# Altium PCB PCB2.PcbDoc
Units mil, origin at the board's own origin, x right, y up, seen from the top; angles counter-clockwise.
Board outline 3060 x 1795 mil, 2 copper layers (Top Layer, Bottom Layer); 19 components, 6 nets, 64 pads, 28 vias.
Unrouted connection lines stored in the file: 1.
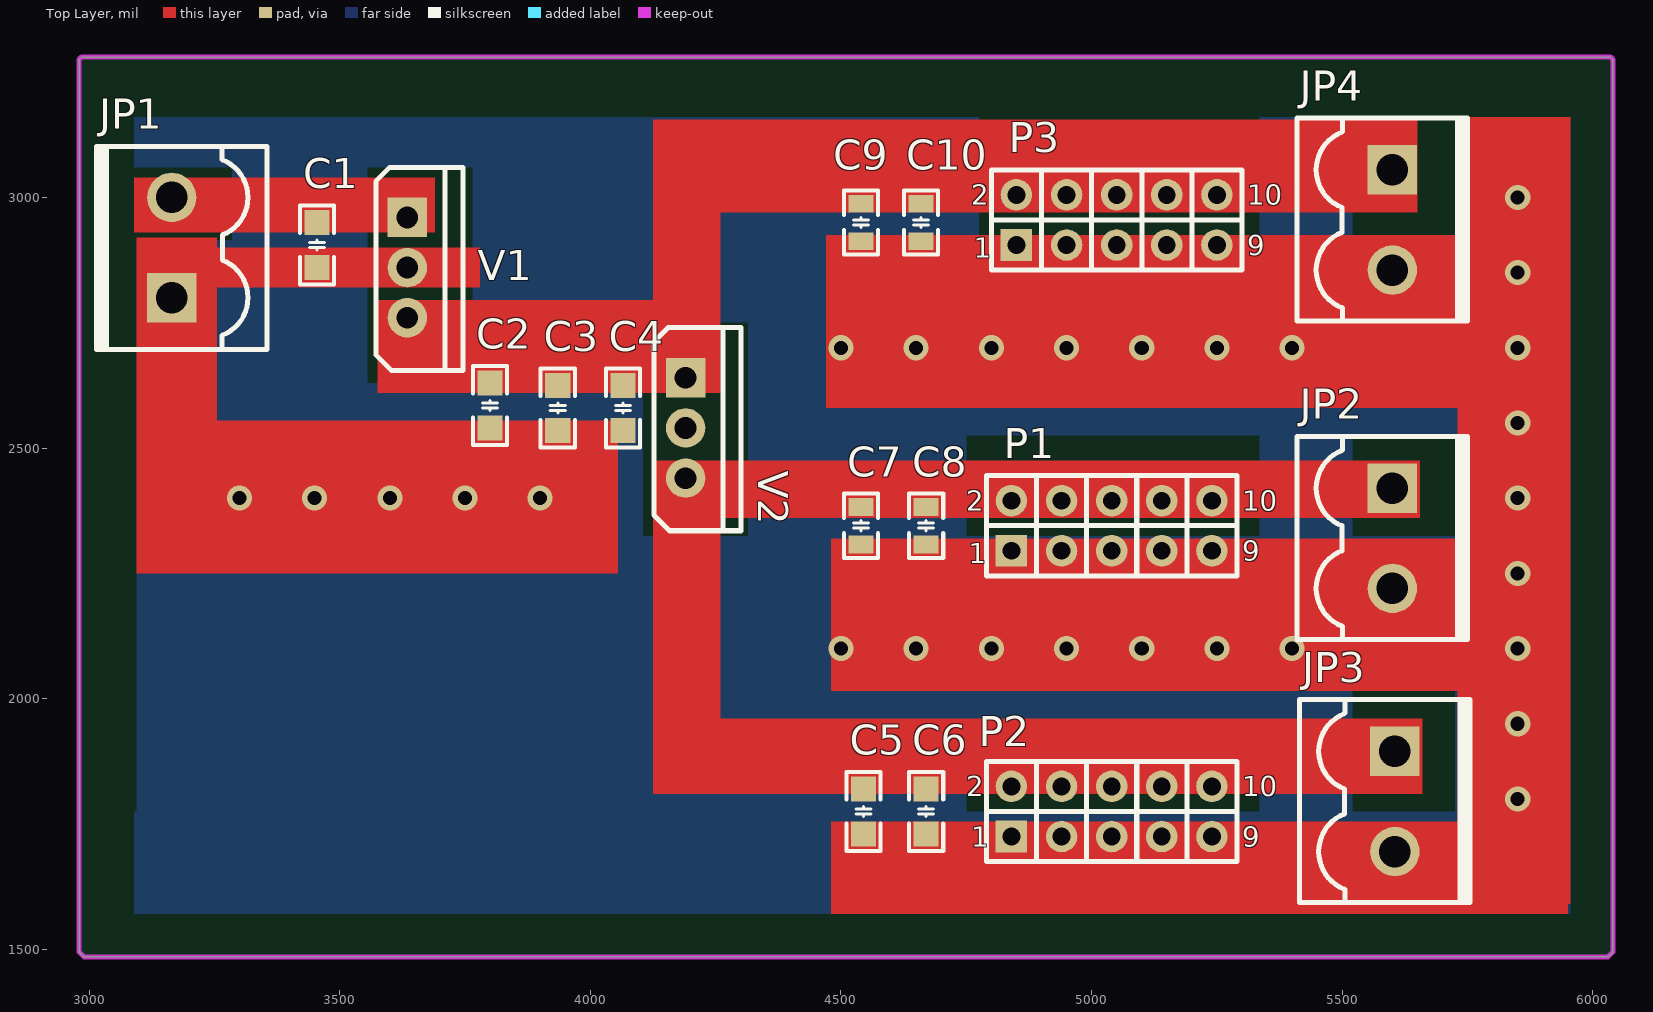
[diagram p0: Top Layer view]
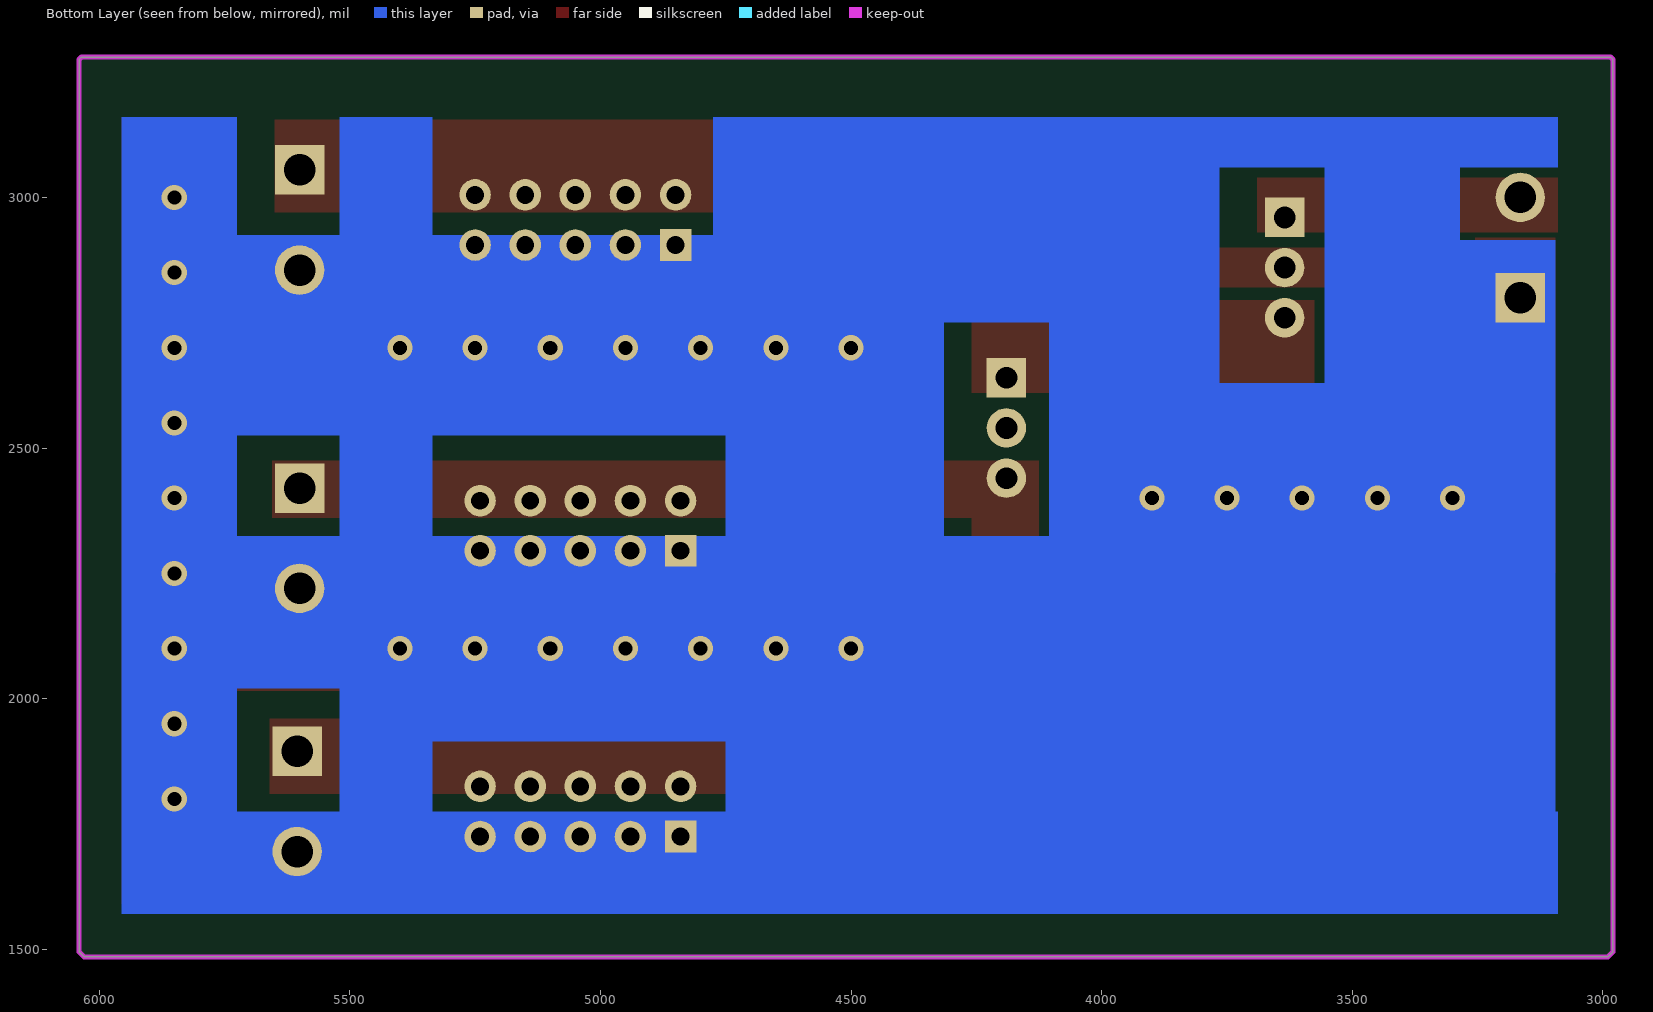
[diagram p1: Bottom Layer view, seen from below]

## Layer stack, top to bottom
Top Solder: solder mask 0.4, Solder Resist, Dk 3.5
Top Layer: signal copper 1.4
Dielectric 1: dielectric 12.6, FR-4, Dk 4.8
Bottom Layer: signal copper 1.4
Bottom Solder: solder mask 0.4, Solder Resist, Dk 3.5

## Board outline
2980,1495 2980,3275 2985,3280 6035,3280 6040,3275 6040,1495 6030,1485 2990,1485

## Design rules (kind name [scope] priority, off if disabled: settings)
Clearance [All] p1: gap=10 ignorepadtopadclearanceinfootprint=FALSE except(0: Arc-Hole Track-Hole SMDPad-Hole THPad-Hole Via-Hole Fill-Hole Poly-Hole Region-Hole Text-Hole)
PolygonConnect [All] p1: connectstyle=Relief reliefconductorwidth=10 reliefentries=4 polygonreliefangle="90 Angle" airgapwidth=10
RoutingVias [All] p1: holewidth=28 width=50 viastyle="Through Hole" minholewidth=28 minwidth=50 maxholewidth=28 maxwidth=50
SolderMaskExpansion [All] p1: expansion=4
Width [All] p1: maxlimit=10 minlimit=10 preferedwidth=10
30 further rules are at their usual default settings.

## Classes and differential pairs
component class Sheet2: C1 C2 C3 C4 C5 C6 V1 V2

## Components (designator, comment, footprint, x,y, rotation, side; value= is the part's Value field where it differs from the comment)
C1 "104" "C 0805_M" 3455,2905 r270 top
C2 "106" "C 0805_M" 3800,2585 r270 top value=104
C3 "104" "C 0805_M" 3935,2580 r270 top
C4 "104" "C 0805_M" 4065,2580 r270 top
C5 "106" "C 0805_M" 4545,1775 r270 top value=104
C6 "104" "C 0805_M" 4670,1775 r270 top
C7 "Comment" "C 0805_L" 4540,2345 r270 top
C8 "Comment" "C 0805_L" 4670,2345 r270 top
C9 "Comment" "C 0805_L" 4540,2950 r270 top
C10 "Comment" "C 0805_L" 4660,2950 r270 top
JP1 "Comment" KF2EDGK5.08-LI-2P 3165,2900 r90 top
JP2 "Comment" KF2EDGK5.08-LI-2P 5600,2320 r270 top
JP3 "Comment" KF2EDGK5.08-LI-2P 5605,1795 r270 top
JP4 "Comment" KF2EDGK5.08-LI-2P 5600,2955 r270 top
P1 "Comment" HDR2.54-LI-2x5P 5040,2345 r0 top
P2 "Comment" HDR2.54-LI-2x5P 5040,1775 r0 top
P3 "Comment" HDR2.54-LI-2x5P 5050,2955 r0 top
V1 "HT7150" TO220A 3635,2860 r270 top
V2 "HT7133" TO220A 4190,2540 r270 top

## Footprints (in the part's own frame and the unit in brackets; to place one, negate y for a bottom-side part, rotate by r counter-clockwise, add the part's x,y. Pads: shape width x height; smd on the part's side, far side on the other; paste and mask are expansions set on the pad)
"C 0805_L" [mil] "无极性贴片电容"
  rect 35x50 smd: 1(-37.4,0) 2(37.4,0)
  silkscreen extent -64,-34 64,34, body extent -39,-24 39,24, height 20
"C 0805_M" [mil] "无极性贴片电容"
  rect 50x50 smd: 1(-45.01,-0.01) 2(45,0)
  silkscreen extent -79,-34 79,34, body extent -39,-24 39,24, height 20
HDR2.54-LI-2x5P [mm] "双排排针，5x2脚"
  rect 1.6x1.6 hole 0.9: 1(-5.08,-1.27)
  round 1.6 hole 0.9: 2(-5.08,1.27) 3(-2.54,-1.27) 4(-2.54,1.27) 5(0,-1.27) 6(0,1.27) 7(2.54,-1.27) 8(2.54,1.27) 9(5.08,-1.27) 10(5.08,1.27)
  silkscreen extent -6.35,-2.54 6.35,2.54, body extent -6.35,-2.54 6.35,2.54, height 8.5
KF2EDGK5.08-LI-2P [mm] "立插端子"
  rect 2.5x2.5 hole 1.6: 1(-2.54,0)
  round 2.5 hole 1.6: 2(2.54,0)
  silkscreen extent -5.16,-4.83 5.13,3.81, body extent -5.08,-4.75 5.08,3.75, height 11.25
TO220A [mm] "220，3脚晶体管"
  rect 2x2 hole 1.1: 1(-2.54,0)
  round 2 hole 1.1: 2(0,0) 3(2.54,0)
  silkscreen extent -5.08,-1.6 5.21,2.82, body extent -5.15,-1.53 5.15,2.9, height 18.5

## Part data
C1 C2 C3 C4 C5 C6: library part Cap, "Capacitor", LatestRevisionDate=17-Jul-2002, LatestRevisionNote="Re-released for DXP Platform.", Published=8-Jun-2000, Publisher="Altium Limited"
V1 V2: library part 78xx, "线性稳压芯片", BOM名称=ÏßÐÔÎ, 学习资源=www.ooocke.

## Via types
v1: diameter 50, hole 28, Top Layer to Bottom Layer, 28 vias

## Nets (pads, with @x,y where several pads share a name; then routed paths per layer and width w, separated by ;. In a path a pad name is that pad's centre, name@x,y a point inside that pad or via, vN(x,y) a via of type N, cw(c..) or ccw(c..) an arc to the next point about the centre after c; other vN are vias at no path point)
3.3V: 
5V: 
+3.3V: C5.1 C6.1 C7.1 C8.1 JP2.1 JP3.1 P1.2 P1.4 P1.6 P1.8 P1.10 P2.2 P2.4 P2.6 P2.8 P2.10 V2.3
+5V: C2.1 C3.1 C4.1 C9.1 C10.1 JP4.1 P3.2 P3.4 P3.6 P3.8 P3.10 V1.3 V2.1
+12: C1.1 JP1.2 V1.1
GND: C1.2 C2.2 C3.2 C4.2 C5.2 C6.2 C7.2 C8.2 C9.2 C10.2 JP1.1 JP2.2 JP3.2 JP4.2 P1.1 P1.3 P1.5 P1.7 P1.9 P2.1 P2.3 P2.5 P2.7 P2.9 P3.1 P3.3 P3.5 P3.7 P3.9 V1.2 V2.2
  other v1: 5850,1800 5850,1950 4500,2100 4650,2100 4800,2100 4950,2100 5100,2100 5250,2100 5400,2100 5850,2100 5850,2250 3300,2400 3450,2400 3600,2400 3750,2400 3900,2400 5850,2400 5850,2550 4500,2700 4650,2700 4800,2700 4950,2700 5100,2700 5250,2700 5400,2700 5850,2700 5850,2850 5850,3000

## Polygon pours and split planes (outlines as drawn)
no net on Top Layer (solid, pour order 0): 3050,3260

## Keep-outs
Keep-Out Layer:
  the board outline again, w10

## Other copper
Top Layer:
  rectangle net GND: 5730,1590 5955,3160
  rectangle net +3.3V: 4125,1810 5660,1960
  rectangle net GND: 4480,1570 5950,1755
  rectangle net GND: 4480,2015 5955,2320
  rectangle net +5V: 4125,2750 4260,3155
  rectangle net GND: 3230,2820 3780,2900
  rectangle net +5V: 4240,2970 5650,3155
  rectangle net +3.3V: 4125,1820 4260,2450
  rectangle net GND: 4470,2580 5950,2765
  rectangle net GND: 4470,2705 5950,2925
  rectangle net GND: 3205,2250 4055,2555
  rectangle net GND: 3095,2250 3255,2920
  rectangle net +5V: 3575,2610 4260,2795
  rectangle net +12: 3090,2930 3690,3040
  rectangle net +3.3V: 4125,2360 5655,2475
Bottom Layer:
  rectangle net GND: 3095,1760 4105,2630
  rectangle net GND: 3285,2895 3555,3150
  rectangle net GND: 3090,3060 3780,3160
  rectangle net GND: 3765,2480 4105,2875
  rectangle net GND: 3095,2020 5955,2325
  rectangle net GND: 4315,2525 5955,2925
  rectangle net GND: 4100,1665 4750,2125
  rectangle net GND: 4315,1960 4750,2605
  rectangle net GND: 5725,1570 5955,3160
  rectangle net GND: 3765,2750 4775,3160
  rectangle net GND: 3095,2615 3555,2915
  rectangle net GND: 4715,1915 5510,2040
  rectangle net GND: 5335,1580 5520,3160
  rectangle net GND: 3090,1570 5950,1775

## Text inside footprints (layer, text, board x,y; h text height)
P1: Top Overlay "10" at 5300,2375 h40; Top Overlay "9" at 5300,2275 h40; Top Overlay "1" at 4755,2270 h40; Top Overlay "2" at 4750,2375 h40
P2: Top Overlay "2" at 4750,1805 h40; Top Overlay "1" at 4760,1705 h40; Top Overlay "9" at 5300,1705 h40; Top Overlay "10" at 5300,1805 h40
P3: Top Overlay "10" at 5310,2985 h40; Top Overlay "9" at 5310,2885 h40; Top Overlay "1" at 4765,2880 h40; Top Overlay "2" at 4760,2985 h40